# Altium PCB WiFi-GPRS_Combo.PcbDoc (part 2 of 2)
Units mm, origin at the board's own origin, x right, y up, seen from the top; angles counter-clockwise.
Board outline 65 x 50 mm, 2 copper layers (Top Layer, Bottom Layer); 80 components, 60 nets, 371 pads, 8 vias.
Unrouted connection lines stored in the file: 169.
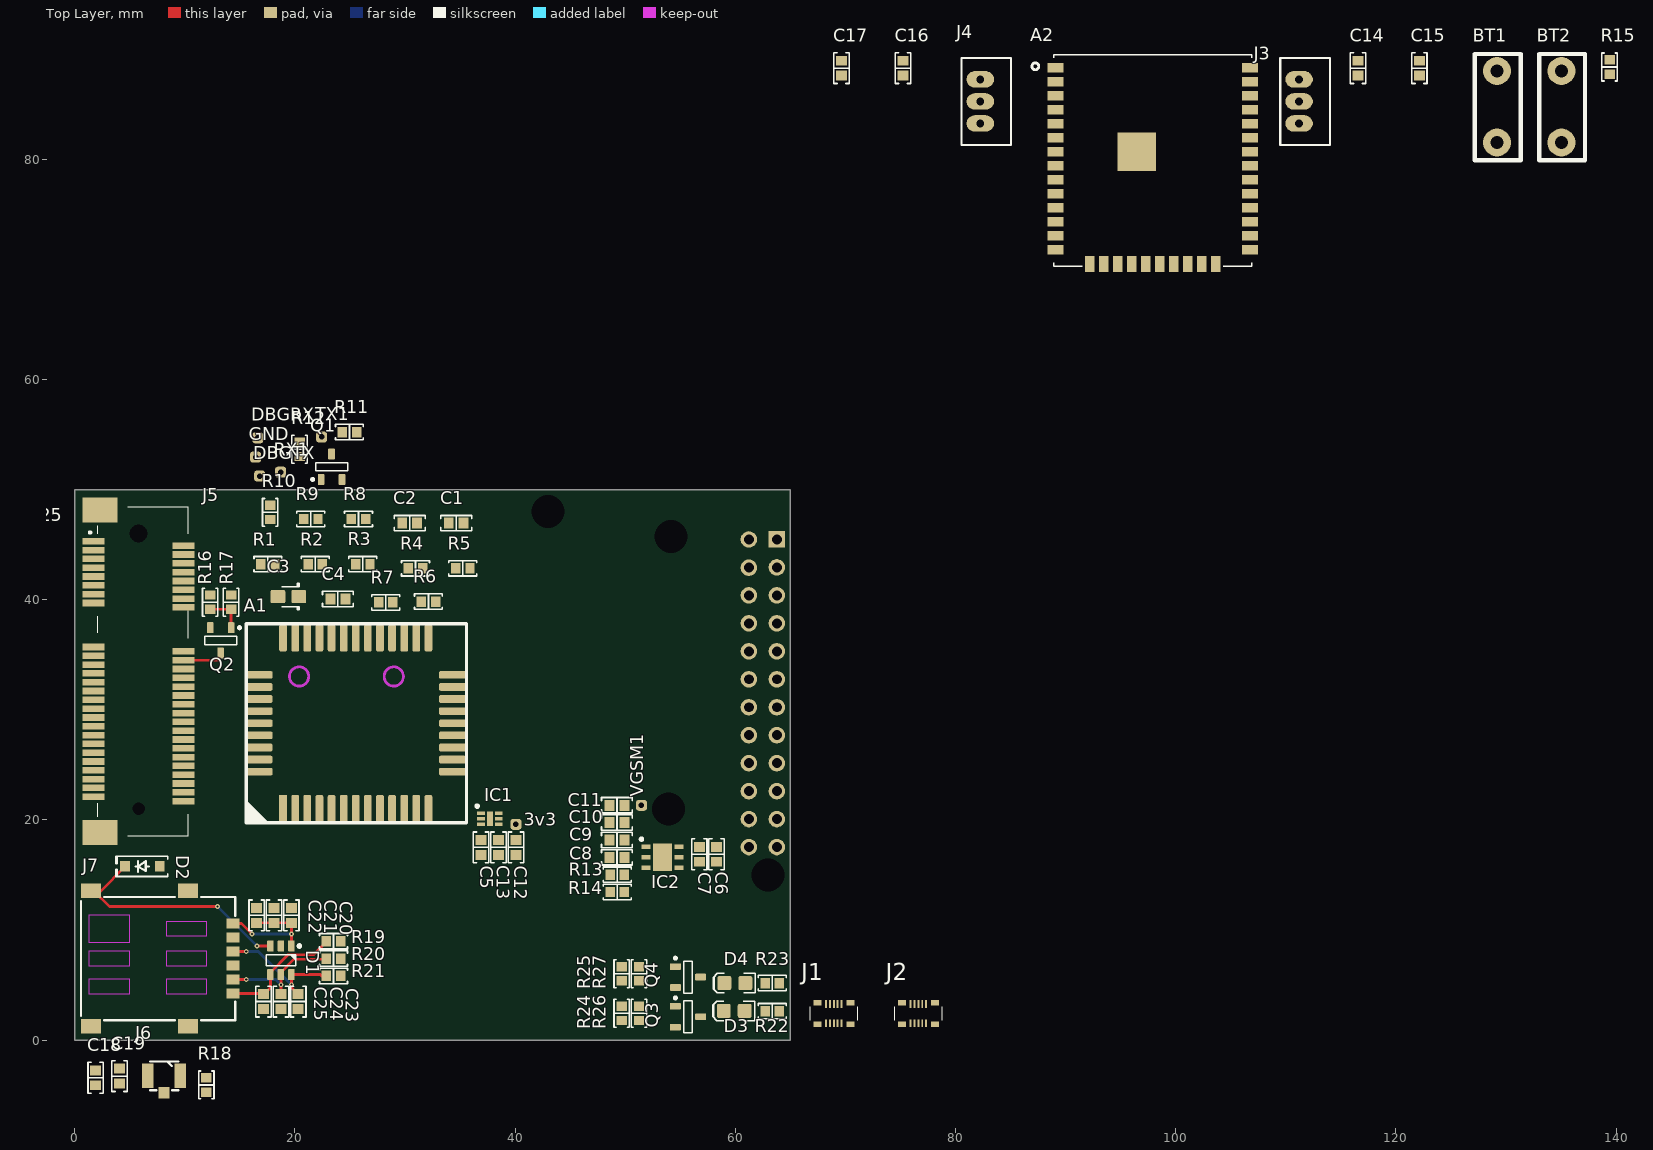
[diagram p0: Top Layer view]

## Part data (continued)
R13: library part Resistor_Chip, "Ceramic, SMT Capacitor", Case/Package=0603, Case Code (Metric)=1608, Manufacturer=Yageo, Manufacturer Part Number=RC0603FR-0766K5L, Max Operating Temperature=155°C, Max Power Dissipation=100mW, Min Operating Temperature=-55°C, Package Quantity=1, Supplier Part Number 1=311-66.5KHRCT-ND, Temperature Coefficient=100ppm/°C, Tolerance=1%, Voltage Rating=50V, Case Code (Imperial)=0603, ComponentLink1Description=https://datasheet.ciiva.com/2454/pyu-r-int-thick-7-2454307.pdf?src-supplier=Digi-Key, ComponentLink1URL=https://datasheet.ciiva.com/2454/pyu-r-int-thick-7-2454307.pdf?src-supplier=Digi-Key, ComponentLink2Description=https://datasheet.ciiva.com/28397/pyu-rc0603-51-rohs-l-4-28397626.pdf?src-supplier=Avnet+Europe, ComponentLink2URL=https://datasheet.ciiva.com/28397/pyu-rc0603-51-rohs-l-4-28397626.pdf?src-supplier=Avnet+Europe, ComponentLink3Description=https://datasheet.ciiva.com/8888/pyu-rc0603-51-rohs-l-4-8888495.pdf?src-supplier=Avnet, ComponentLink3URL=https://datasheet.ciiva.com/8888/pyu-rc0603-51-rohs-l-4-8888495.pdf?src-supplier=Avnet, ComponentLink4Description=https://datasheet.ciiva.com/2454/pyu-r-int-thick-7-2454306.pdf?src-supplier=Digi-Key, ComponentLink4URL=https://datasheet.ciiva.com/2454/pyu-r-int-thick-7-2454306.pdf?src-supplier=Digi-Key, ComponentLink5Description=https://datasheet.ciiva.com/2454/pyu-r-int-thick-7-2454308.pdf?src-supplier=Digi-Key, ComponentLink5URL=https://datasheet.ciiva.com/2454/pyu-r-int-thick-7-2454308.pdf?src-supplier=Digi-Key, Composition="Thick Film", Contact Plating=Tin,Matte, Depth=0.8mm, Features="Moisture Resistant", Height=0.022inch, Lead Free="Lead Free", Length=0.063inch, Military Standard=Not, Number of Terminations=2, Packaging="Tape and Reel", Power Rating=100mW, Pricing 1="1 = 0,10000, 10 = 0,02300, 100 = 0,00940, 1000 = 0,00421, 2500 = 0,00366 (USD)", Resistance=66.5kR, RoHS=Yes, Stock 1=896283, Supplier 1=Digi-Key, Termination=SMD/SMT, Voltage Rating (DC)=50V, Width=0.031inch
R18: library part Resistor_Chip, "Ceramic, SMT Capacitor", Case/Package=0603, Case Code (Metric)=1608, Current Rating=1A, Manufacturer="Stackpole Electronics", Manufacturer Part Number=RMCF0603ZT0R00, Max Operating Temperature=155°C, Max Power Dissipation=100mW, Min Operating Temperature=-55°C, Supplier Part Number 1=RMCF0603ZT0R00CT-ND, Working Voltage=75V, [NA]=[NA], Case Code (Imperial)=0603, Composition="Thick Film", Contact Plating=Matte,Tin, Depth=0.8mm, Features="Automotive AEC-Q200", Height=0.022inch, Lead Free="Lead Free", Length=1.55mm, Military Standard=Not, Mount="Surface Mount", Number of Terminations=2, Packaging="Tape and Reel", Power Rating=100mW, Pricing 1="1 = 0,10000, 10 = 0,01600, 25 = 0,01160, 50 = 0,00880, 100 = 0,00640, 250 = 0,00492, 500 = 0,00392, 1000 = 0,00289 (USD)", Radiation Hardening=No, Resistance=0mR, RoHS=Yes, Stock 1=2712388, Supplier 1=Digi-Key, Width=0.031inch
R19 R20 R21: library part Resistor_Chip, "Ceramic, SMT Capacitor", Case/Package=0603, Case Code (Metric)=1608, Manufacturer=Yageo, Manufacturer Part Number=RC0603FR-0722RL, Max Operating Temperature=155°C, Max Power Dissipation=100mW, Min Operating Temperature=-55°C, Package Quantity=1, Supplier Part Number 1=311-22.0HRCT-ND, Temperature Coefficient=100ppm/°C, Tolerance=1%, Voltage Rating=50V, Case Code (Imperial)=0603, ComponentLink1Description=http://www.yageo.com/documents/recent/PYu-RC_Group_51_RoHS_L_10.pdf?src-supplier=Digi-Key, ComponentLink1URL=http://www.yageo.com/documents/recent/PYu-RC_Group_51_RoHS_L_10.pdf?src-supplier=Digi-Key, ComponentLink2Description=http://documents.rs-components.com/techlib://itc_doclist_GB.htm?stockno=5050369&src-supplier=RSComponents, ComponentLink2URL=http://documents.rs-components.com/techlib://itc_doclist_GB.htm?stockno=5050369&src-supplier=RSComponents, ComponentLink3Description=http://www.farnell.com/datasheets/1868787.pdf?src-supplier=Element14, ComponentLink3URL=http://www.farnell.com/datasheets/1868787.pdf?src-supplier=Element14, ComponentLink4Description=http://www.farnell.com/datasheets/443971.pdf?src-supplier=Element14, ComponentLink4URL=http://www.farnell.com/datasheets/443971.pdf?src-supplier=Element14, Composition="Thick Film", Depth=0.8mm, Features="Moisture Resistant", Height=0.022inch, Lead Free="Lead Free", Length=1.6mm, Military Standard=Not, Number of Pins=2, Number of Terminations=2, Packaging="Tape and Reel", Power Rating=100mW, Pricing 1="1 = 0,10000, 10 = 0,02400, 100 = 0,00970, 1000 = 0,00437, 2500 = 0,00379 (USD)", REACH SVHC="No SVHC", Resistance=22R, RoHS=Yes, Stock 1=4572399, Supplier 1=Digi-Key, Termination=SMD/SMT, Voltage Rating (DC)=50V, Width=0.031inch
R22 R23: library part Resistor_Chip, "Ceramic, SMT Capacitor", Case/Package=0603, Case Code (Metric)=1608, Manufacturer=Yageo, Manufacturer Part Number=RC0603JR-0791RL, Max Operating Temperature=155°C, Min Operating Temperature=-55°C, Power Rating=100mW, Supplier Part Number 1=311-91GRCT-ND, Temperature Coefficient=100ppm/°C, Tolerance=5%, Voltage Rating=75V, Voltage Rating (DC)=50V, Case Code (Imperial)=0603, Composition="Thick Film", Depth=0.8mm, Height=0.45mm, Lead Free="Lead Free", Length=1.6mm, Military Standard=Not, Number of Terminations=2, Packaging="Tape and Reel", Pricing 1="1 = 0,10000, 10 = 0,02000, 100 = 0,00810, 1000 = 0,00362, 2500 = 0,00314 (USD)", Resistance=91R, RoHS=Yes, Stock 1=320507, Supplier 1=Digi-Key, Termination=SMD/SMT, Weight=7.1E-05oz, Width=0.8mm, Working Voltage=75V

## Free pads (board coordinates)
  rect 1.5x1.5 hole 0.9: 1(63.77,45.47)
  round 1.5 hole 0.9: 2(63.77,42.93) 3(63.77,40.39) 4(63.77,37.85) 5(63.77,35.31) 6(63.77,32.77) 7(63.77,30.23) 8(63.77,27.69) 9(63.77,25.15) 10(63.77,22.61) 11(63.77,20.07) 12(63.77,17.53) 13(61.23,45.47) 14(61.23,42.905) 15(61.23,40.39) 16(61.23,37.85) 17(61.23,35.31) 18(61.23,32.77) 19(61.23,30.23) 20(61.23,27.69) 21(61.23,25.15) 22(61.23,22.61) 23(61.23,20.07) 24(61.23,17.53)
  round 2 hole 3: ""(42.975,48) ""(53.925,21) ""(54.175,45.725) ""(62.975,15)

## Via types
v1: diameter 0.45, hole 0.2, Top Layer to Bottom Layer, tented both sides, 8 vias

## Nets (pads, with @x,y where several pads share a name; then routed paths per layer and width w, separated by ;. In a path a pad name is that pad's centre, name@x,y a point inside that pad or via, vN(x,y) a via of type N, cw(c..) or ccw(c..) an arc to the next point about the centre after c; other vN are vias at no path point)
3v3: 3v3.1 A2.2 C13.2 C16.2 C17.2 IC1.4 pad.3 R15.2
5V: C5.2 C6.2 C7.2 IC1.3 IC2.6 J1.MP1 J1.MP2 J2.MP1 J2.MP2 pad.22 pad.23 pad.24
ANT: A1.35 C18.2 R18.1
CLK: C24.2 D1.5 J7.C3 R20.1 | length 11.2
  Top Layer w0.254: J7.C3 v1(15.58,5.495) ; C24.2 v1(18.725,5.025) D1.5 18.725,6.15 19.925,7.35 22.85,7.35 R20.1
  Bottom Layer w0.254: v1(15.58,5.495) 18.255,5.495 v1(18.725,5.025)
CTS: A1.22 J1.3 J5.25 pad.6 R4.1 R4.2
CTS: 
DATA: C25.2 D1.4 J7.C7 R19.1 | length 11.3
  Top Layer w0.254: J7.C7 17.1,4.225 C25.2 17.2,4.175 17.775,4.75 D1.4 17.775,6.15 19.375,7.75 21.675,7.75 22.85,8.925 R19.1
DCD: A1.21 J1.8 pad.8 R5.1 R5.2 R10.2 R16.2
DCD: 
DTR: A1.19 J1.10 J5.31 pad.21 R6.1 R6.2
DTR: 
EN: A2.3 BT1.1 C14.2 J4.1 R15.1
ESP_RXD0: A2.34 J3.2
ESP_TXD0: A2.35 J3.1
GND: A1.27 A1.34 A1.36 A1.37 A1.40 A1.41 A2.1 A2.15 A2.18 A2.38 A2.39 BT1.2 BT2.2 C1.1 C2.1 C3.1 C4.1 C5.1 C6.1 C7.1 C9.1 C10.1 C11.1 C12.1 C13.1 C14.1 C15.1 C16.1 C17.1 C18.1 C19.1 GND.1 IC1.2 IC1.7 IC2.3 J1.MP3 J1.MP4 J2.MP3 J2.MP4 J3.3 J4.3 J5.4 J5.9 J5.15 J5.18 J5.21 J5.26 J5.27 J5.29 J5.34 J5.35 J5.37 J5.40 J5.43 J5.50 J6.G pad.10 pad.11 pad.12 Q1.2 Q2.2 Q3.2 Q4.2 R8.1 R9.1 R10.1 R12.1 R14.2 R17.1 R26.1 R27.1
GSM_RX: A1.38 DBGRX.1 pad.9 pad.16 RX1.1
GSM_TX: A1.39 DBGTX.1 pad.17 TX1.1
IO0: A2.25 BT2.1 C15.2 J4.2
NetA1_7: A1.7 Q1.3
NetC8_1: C8.1 IC2.2 R13.1 R14.1
NetC12_2: C12.2 IC1.6
NetC19_2: C19.2 J6.S R18.2
NetD3_A: D3.A R22.1
NetD3_K: D3.K Q3.3
NetD4_A: D4.A R23.1
NetD4_K: D4.K Q4.3
NetIC1_1: IC1.1 J1.6
NetIC2_5: IC2.5 J2.2
NetQ1_1: Q1.1 R11.1 R12.2
NetQ2_1: Q2.1 R16.1 R17.2 | length 3.6
  Top Layer w0.254: R16.1 R17.2 Q2.1
NetQ3_1: Q3.1 R24.1 R26.2
NetQ4_1: Q4.1 R25.1 R27.2
NETSTAT: A1.16 J5.42 R24.2
POWERKEY: J1.4 J5.22 R11.2
RING: A1.20 J1.1 J5.17 pad.20 R7.1 R7.2
RING: 
RST: C23.2 D1.6 J7.C2 pad.7 R21.1 | length 11.8
  Top Layer w0.254: J7.C2 v1(15.58,8.035) ; C23.2 20.25,4.175 19.675,4.75 v1(19.675,5.025) D1.6 22.3,5.95 22.425,5.825 R21.1
  Bottom Layer w0.254: v1(15.58,8.035) 16.665,8.035 v1(19.675,5.025)
RTS: A1.23 J1.5 J5.23 pad.18 R3.1 R3.2 R9.2
RTS: 
RXD: A1.18 J1.7 J5.11 R1.1 R1.2 R8.2
RXD: 
SIM_CLK: A1.13 J5.12 R20.2
SIM_DATA: A1.11 J5.10 R19.2
SIM_DETECT: D1.3 D2.2 J5.44 J7.SW | length 22.2
  Top Layer w0.254: J7.SW J7.SW@1.725,13.55 ; D2.2 4.575,15.75 2.375,13.55 J7.SW@1.725,13.55 ; v1(12.975,12.125) 3.15,12.125 J7.SW@1.725,13.55 ; v1(16.55,8.55) D1.3
  Bottom Layer w0.254: v1(12.975,12.125) v1(16.55,8.55)
SIM_GND: A1.10 C20.1 C21.1 C22.1 C23.1 C24.1 C25.1 D1.2 D2.1 J7.C5 J7.S
SIM_RST: A1.12 J5.14 R21.2
SIMVCC: A1.14 C20.2 C21.2 C22.2 D1.1 J5.8 J7.C1 | length 10.9
  Top Layer w0.254: J7.C1 15.15,10.575 v1(16.1,9.625) ; C22.2 C21.2 C20.2 v1(19.675,9.625) D1.1
  Bottom Layer w0.254: v1(16.1,9.625) v1(19.675,9.625)
SPI_IRQ: A2.22 J2.4 pad.1
SPI_MISO: A2.21 J2.10 pad.13
SPI_MOSI: A2.19 J2.8 pad.2
SPI_SCL: A2.20 J2.6 pad.14
TXD: A1.17 J1.9 J5.13 R2.1 R2.2
TXD: 
TXMON: A1.25 R25.2
Vgsm: A1.42 A1.43 C1.2 C2.2 C3.2 C4.2 C8.2 C9.2 C10.2 C11.2 IC2.1 J5.2 J5.24 J5.39 J5.41 J5.52 R13.2 R22.2 R23.2 VGSM1.1
W_DISABLE#: J5.20 Q2.3 | length 3.9
  Top Layer w0.254: J5.20 13,34.5 13.25,34.75 Q2.3
WiFi_CTS: A2.23 J2.3 pad.5
WiFi_RTS: A2.13 J2.5 pad.4
WiFi_RX: A2.28 J2.9
WiFi_TX: A2.27 J2.7 pad.15
pads on no net: A1.1 A1.2 A1.3 A1.4 A1.5 A1.6 A1.8 A1.9 A1.15 A1.24 A1.26 A1.28 A1.29 A1.30 A1.31 A1.32 A1.33 A1.44 A2.4 A2.5 A2.6 A2.7 A2.8 A2.9 A2.10 A2.11 A2.12 A2.14 A2.16 A2.17 A2.24 A2.26 A2.29 A2.30 A2.31 A2.32 A2.33 A2.36 A2.37 C3.0 D1.0 D3.0 D4.0 IC1.5 IC2.4 IC2.7 J1.2 J2.1 J5.1 J5.3 J5.5 J5.6 J5.7 J5.16 J5.19 J5.28 J5.30 J5.32 J5.33 J5.36 J5.38 J5.45 J5.46 J5.47 J5.48 J5.49 J5.51 J5.MH1 J5.MH2 J5.MP1 J5.MP2 J7.C6

## Silkscreen, mask and mechanical layers (free items; w line width, h text height)
Top Overlay:
  text "X: 31,4 / Y: 33,425" at -8.7,46.7 h2
Mechanical 1:
  the board outline again, w0.254